# EAGLE board Franzininho (EAGLE 8.3.1)
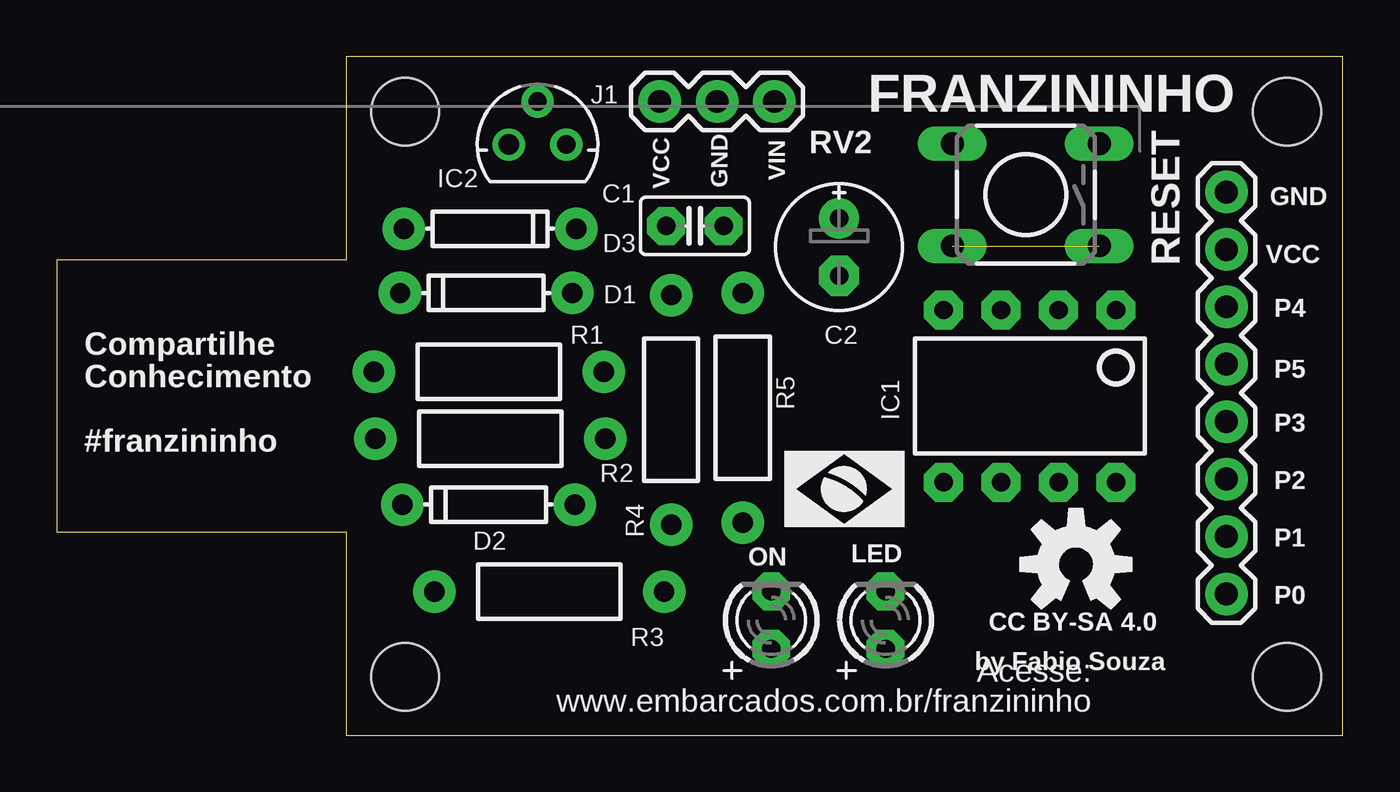
[diagram p0: board, top side]
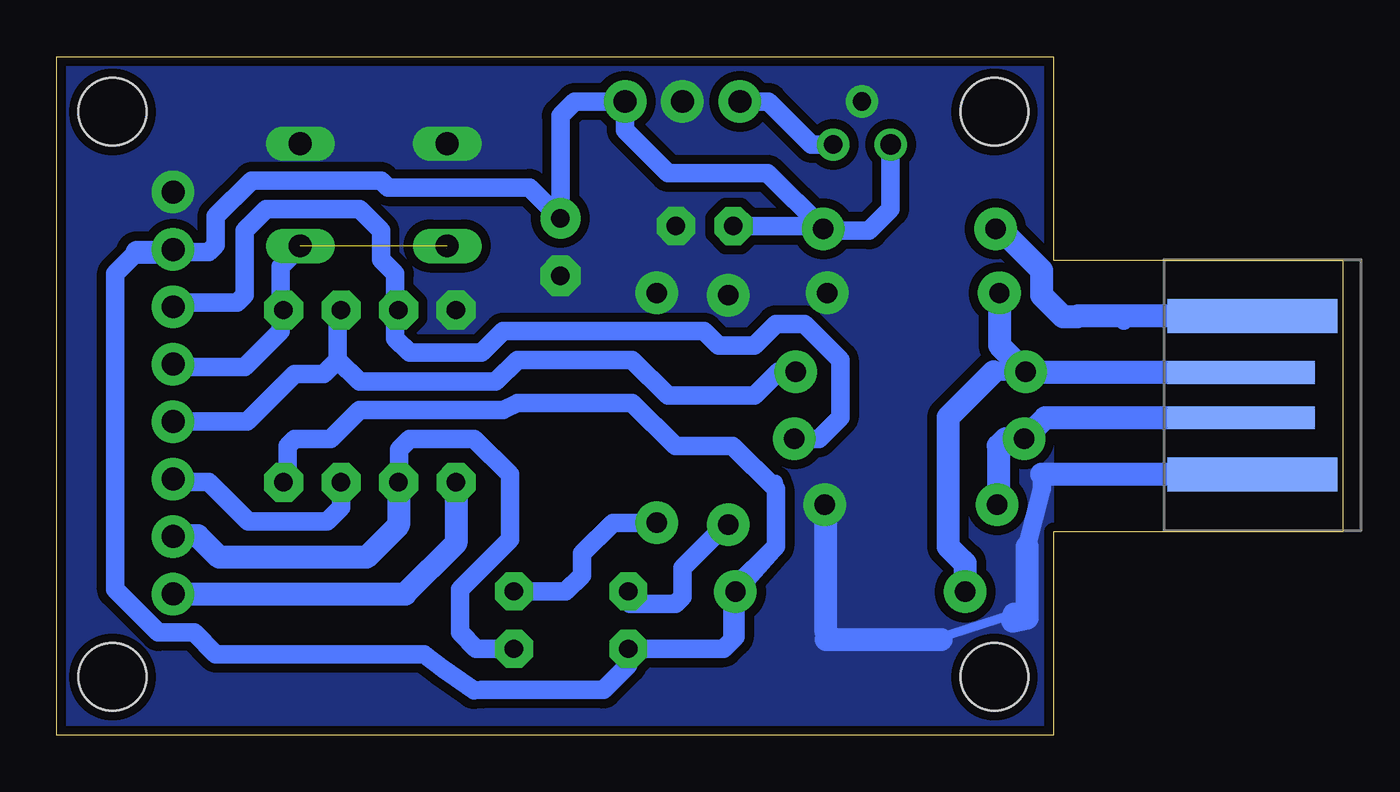
[diagram p1: board, bottom side, seen from below]

Size 56.89 x 30.03 mm. Coordinates in mm from the lower left corner, seen from the top.
Outline: 0,9 12.81,9 12.81,0 56.89,0 56.89,30.03 12.81,30.03 12.81,21.03 0,21.03 0,9
Copper layers (1*16): Top 0.0356mm / dielectric 1.5011mm / Bottom 0.0356mm
Design rules "default *": minimum track width 8mil, minimum drill 13mil, track to track 12mil, track to pad 12mil, pad to pad 12mil, via to via 12mil, smd to smd 8mil, copper to edge 15mil, drill to drill 15mil, minimum pad ring 7mil, minimum via ring 7mil, stop-mask expansion 4mil, vias tented up to drill 25mil, thermal gap 10mil
Holes 3 mm at 15.42,27.58 54.42,27.58 54.42,2.58 15.42,2.58

## Footprints (pad centres in the part's own frame; a part is rotated, then mirrored left to right if it is on the bottom)
C025-025X050 = drill 0.813 pad 1.676 octagon: 1 -1.27,0; 2 1.27,0
E2,5-6E = drill 0.813 pad 1.778: + -1.27,0 | drill 0.813 pad 1.778 octagon: - 1.27,0
DIODE-BZT52 = drill 0.9 pad 1.88: A -3.81,0; C 3.81,0
DIODE-1N4148 = drill 0.9 pad 1.88: A -3.81,0; C 3.81,0
DIP08 = drill 0.813 pad 1.727 octagon: 1 -3.81,-3.81; 2 -1.27,-3.81; 3 1.27,-3.81; 4 3.81,-3.81; 5 3.81,3.81; 6 1.27,3.81; 7 -1.27,3.81; 8 -3.81,3.81
78LXX = drill 0.813 pad 1.422: GND 0,1.905; IN 1.27,0 | drill 0.9 pad 1.422: OUT -1.27,0
1X03 = drill 1.016 pad 1.88: 1 0,0; 2 2.54,0; 3 5.08,0
1X08_ROUND = drill 1.016 pad 1.88: 1 0,0; 2 2.54,0; 3 5.08,0; 4 7.62,0; 5 10.16,0; 6 12.7,0; 7 15.24,0; 8 17.78,0
LED3MM = drill 0.813 pad 1.676 octagon: A -1.27,0; K 1.27,0
AXIAL-0.4 = drill 0.9 pad 1.88: P$1 -5.08,0; P$2 5.08,0
TAC-SWITCH-PTH = drill 1.016 pad 1.524 long: 1 -3.251,2.261; 2 3.251,2.261; 3 -3.251,-2.261; 4 3.251,-2.261
USB-A-PCB = smd 7.5 x 1.5: 5V -0.2,-3.5; GND -0.2,3.5 | smd 6.5 x 1: USB_M 0.3,-1; USB_P 0.3,1

## Placement (x,y rotation side)
C1  0.1uf  [C025-025X050]  28.23,22.54 0 top
C2  10uF  [E2,5-6E]  34.61,21.6 270 top
D1  BZT52  [DIODE-BZT52]  19,19.57 180 top
D2  BZT52  [DIODE-BZT52]  19.1,10.2 180 top
D3  1N4148  [DIODE-1N4148]  19.17,22.41 0 top
IC1  ATTINY85 - 20PU  [DIP08]  43.04,15 180 top
IC2  [78LXX]  21.27,26.14 0 top
J1  [1X03]  31.75,28.04 180 top
JP3  [1X08_ROUND]  51.74,6.26 90 top
LED  [LED3MM]  36.66,5.1 90 top
LOGO1  OSHW-LOGOM  [OSHW-LOGO-M]  45.09,7.56 0 top
ON  [LED3MM]  31.61,5.1 90 top
R1  68R  [AXIAL-0.4]  19.12,16.09 0 top
R2  68R  [AXIAL-0.4]  19.18,13.13 0 top
R3  1K5  [AXIAL-0.4]  21.79,6.36 180 top
R4  1K  [AXIAL-0.4]  27.18,14.4 270 top
R5  1K  [AXIAL-0.4]  30.34,14.49 270 top
RESET  TACTILE-SWITCH-PTH  [TAC-SWITCH-PTH]  42.86,23.91 180 top
X1  USBPCB  [USB-A-PCB]  4.21,15.05 180 bottom

## Library data of the parts
C1 C2 LED ON = adafruit
D1 D2 = SparkFun-DiscreteSemi; PROD-ID: DIO-08199
D3 = SparkFun-DiscreteSemi; PROD_ID: DIO-08378
IC1 = SparkFun-DigitalIC; PROD_ID: IC-09439; VALUE: TINY45-20-DIP
IC2 = v-reg
J1 = SparkFun-Connectors
JP3 = SparkFun-Connectors; PROD_ID: CONN-08437
LOGO1 = SparkFun-Aesthetics
R1-R5 = SparkFun-Passives
RESET = GeekAmmo
X1 = SparkFun

## Nets
5V: C1.1 C2.+ D3.C IC1.8 IC2.OUT J1.1 JP3.7 ON.A R3.P$1
GND: C1.2 C2.- D1.A D2.A IC1.4 IC2.GND J1.2 JP3.8 R4.P$1 R5.P$1 RESET.3 RESET.4 X1.GND
N$1: IC1.2 JP3.4 R1.P$2
N$2: IC1.6 JP3.2 LED.A
N$3: IC1.5 JP3.1
N$4: D3.A X1.5V
N$5: IC1.7 JP3.3
N$6: IC1.3 JP3.6 R2.P$2
N$7: IC2.IN J1.3
N$8: IC1.1 JP3.5 RESET.1 RESET.2
N$10: D1.C R1.P$1 R3.P$2 X1.USB_M
N$11: D2.C R2.P$1 X1.USB_P
N$12: LED.K R5.P$2
N$17: ON.K R4.P$2

## Tracks (layer width: path | path; a pad name or v marks a point on that pad's centre or on a via)
5V
  Bottom 0.406: D3.C 22.94,22.41 22.86,22.33 | 52.09,21.38 JP3.7
  Bottom 0.61: 25.08,11.22 25.08,10.9
  Bottom 0.813: 25.08,8.38 25.08,10.9 26.99,12.8 29.53,12.8 31.43,14.71 36.51,14.71 37.15,14.39 43.5,14.39 44.77,13.12 46.36,13.12 46.67,12.8 46.67,11.37 IC1.8 | 25.08,8.38 R3.P$1 26.87,4.35 26.99,4.23 | 53.34,21.38 54.29,20.42 54.29,6.45 52.39,4.55 50.8,4.55 49.85,3.6 40.64,3.6 39.79,2.94 38.44,1.99 38.1,2.01 32.7,2.01 31.61,3.1 ON.A 27.39,3.83 26.99,4.23 | JP3.7 51.62,21.38 50.16,21.38 49.85,21.69 49.85,22.96 48.26,24.55 42.55,24.55 42.23,24.23 35.97,24.23 C2.+ 34.61,27.41 33.97,28.04 J1.1 31.75,26.77 29.84,24.87 25.44,24.87 D3.C | 25.08,8.38 25.08,8.36 26.99,6.45 26.99,4.23 | C1.1 23.11,22.54 D3.C | IC2.OUT 20,23.28 20.95,22.33 22.9,22.33 D3.C
  Bottom 1.016: 53.34,21.38 51.86,21.38 JP3.7
GND
  Bottom 0.406: 22.86,4.23 22.86,4.55 | 22.86,10.15 D2.A | 14.54,5.36 18.1,4.23
  Bottom 0.813: 13.32,11.55 13.32,10.91 13.97,8.36
  Bottom 1.016: X1.GND 13.32,11.55 | 17.78,4.23 18.1,4.23 22.86,4.23 | 22.86,4.55 22.86,10.15 | 13.97,8.36 13.97,5.18 | 14.6,5.05 13.97,5.18 | 13.97,5.18 14.54,5.36
  pour Bottom (isolate 0.406, no thermals): 12.83,29.88 56.86,29.88 56.92,0.01 12.77,-0.08
N$1
  Bottom 0.813: 44.45,16.61 43.5,15.66 37.47,15.66 36.51,16.61 31.43,16.61 29.84,15.02 26.03,15.02 24.97,16.09 R1.P$2 | 44.45,16.61 44.45,18.68 IC1.2 | JP3.4 48.45,13.88 46.36,15.98 45.09,15.98 44.45,16.61
N$2
  Bottom 0.406: 41.75,11.21 IC1.6
  Bottom 0.813: 41.75,11.21 41.75,12.64 41.27,13.12 38.42,13.12 36.83,11.53 36.83,8.67 39.05,6.45 39.05,4.55 38.33,3.83 LED.A
  Bottom 1.016: IC1.6 41.77,9.29 43.18,7.88 49.69,7.88 50.64,8.83 51.7,8.83 JP3.2
N$3
  Bottom 1.016: IC1.5 39.23,8.5 41.47,6.26 JP3.1
N$4
  Bottom 0.813: D3.A 15.16,22.41 | 9.68,18.36 9.84,18.52 11.75,18.52 11.72,18.55
  Bottom 1.016: 15.16,22.41 13.33,20.58 13.33,19.47 12.38,18.52 11.75,18.52 | X1.5V 11.72,18.55
N$5
  Bottom 0.813: IC1.7 44.31,10.08 44.93,9.47 48.42,9.47 50.16,11.22 51.62,11.22 JP3.3
N$6
  Bottom 0.406: 41.91,18.68 IC1.3
  Bottom 0.61: R2.P$2
  Bottom 0.813: R2.P$2 23.18,13.12 22.23,14.07 22.23,16.61 23.81,18.2 25.08,18.2 26.03,17.25 27.62,17.25 28.26,17.88 37.15,17.88 38.1,16.93 41.27,16.93 41.91,17.57 41.91,18.68 41.91,20.42 42.55,21.06 42.55,22.33 43.5,23.28 47.62,23.28 48.58,22.33 48.58,19.47 48.9,19.15 51.54,19.15 JP3.6 51.62,18.84
N$7
  Bottom 0.813: IC2.IN 23.49,26.14 25.4,28.04 J1.3
N$8  (1 unrouted)
  Bottom 0.61: 51.62,16.29 JP3.5 | IC1.1 46.99,18.68
  Bottom 0.813: 46.99,18.68 46.99,17.88 48.58,16.29 51.62,16.29 | RESET.1 46.11,21.62 46.99,20.74 46.99,18.95 IC1.1
N$10
  Bottom 0.406: 14,16.05 R1.P$1 | 16.83,7.72 16.8,7.72 16.71,7.63
  Bottom 0.813: R1.P$1 15.44,16.09
  Bottom 1.016: X1.USB_M 14,16.05 | D1.C 15.19,17.25 R1.P$1 | 15.44,16.09 17.46,14.07 17.46,8.36 16.83,7.72 | R3.P$2 16.71,7.63
N$11
  Bottom 0.61: R2.P$1 14.1,12.99 | 15.24,10.26 D2.C
  Bottom 1.016: X1.USB_P 13.18,14.05 R2.P$1 14.92,13.12 15.24,12.8 15.24,10.26
N$12
  Bottom 0.813: R5.P$2 32.29,9.41 33.66,8.04 33.66,7.09 34.37,6.37 LED.K
N$17
  Bottom 0.813: R4.P$2 27.3,9.32 29.21,7.4 29.21,6.14 29.53,5.82 31.52,5.82 ON.K

## Text on the board
tNames: FRANZININHO | VCC | RV2 | VIN | GND | GND | VCC | P4 | P5 | P3 | P2 | Compartilhe / Conhecimento / / #franzininho | P1 | P0 | CC BY-SA 4.0 | Acesse: / www.embarcados.com.br/franzininho | by Fabio Souza